# Altium PCB Keypad 2.PcbDoc
Units mm, origin at the board's own origin, x right, y up, seen from the top; angles counter-clockwise.
Board outline 100 x 100 mm, 2 copper layers (Top Layer, Bottom Layer); 34 components, 8 nets, 152 pads, 0 vias.
Unrouted connection lines stored in the file: 16.
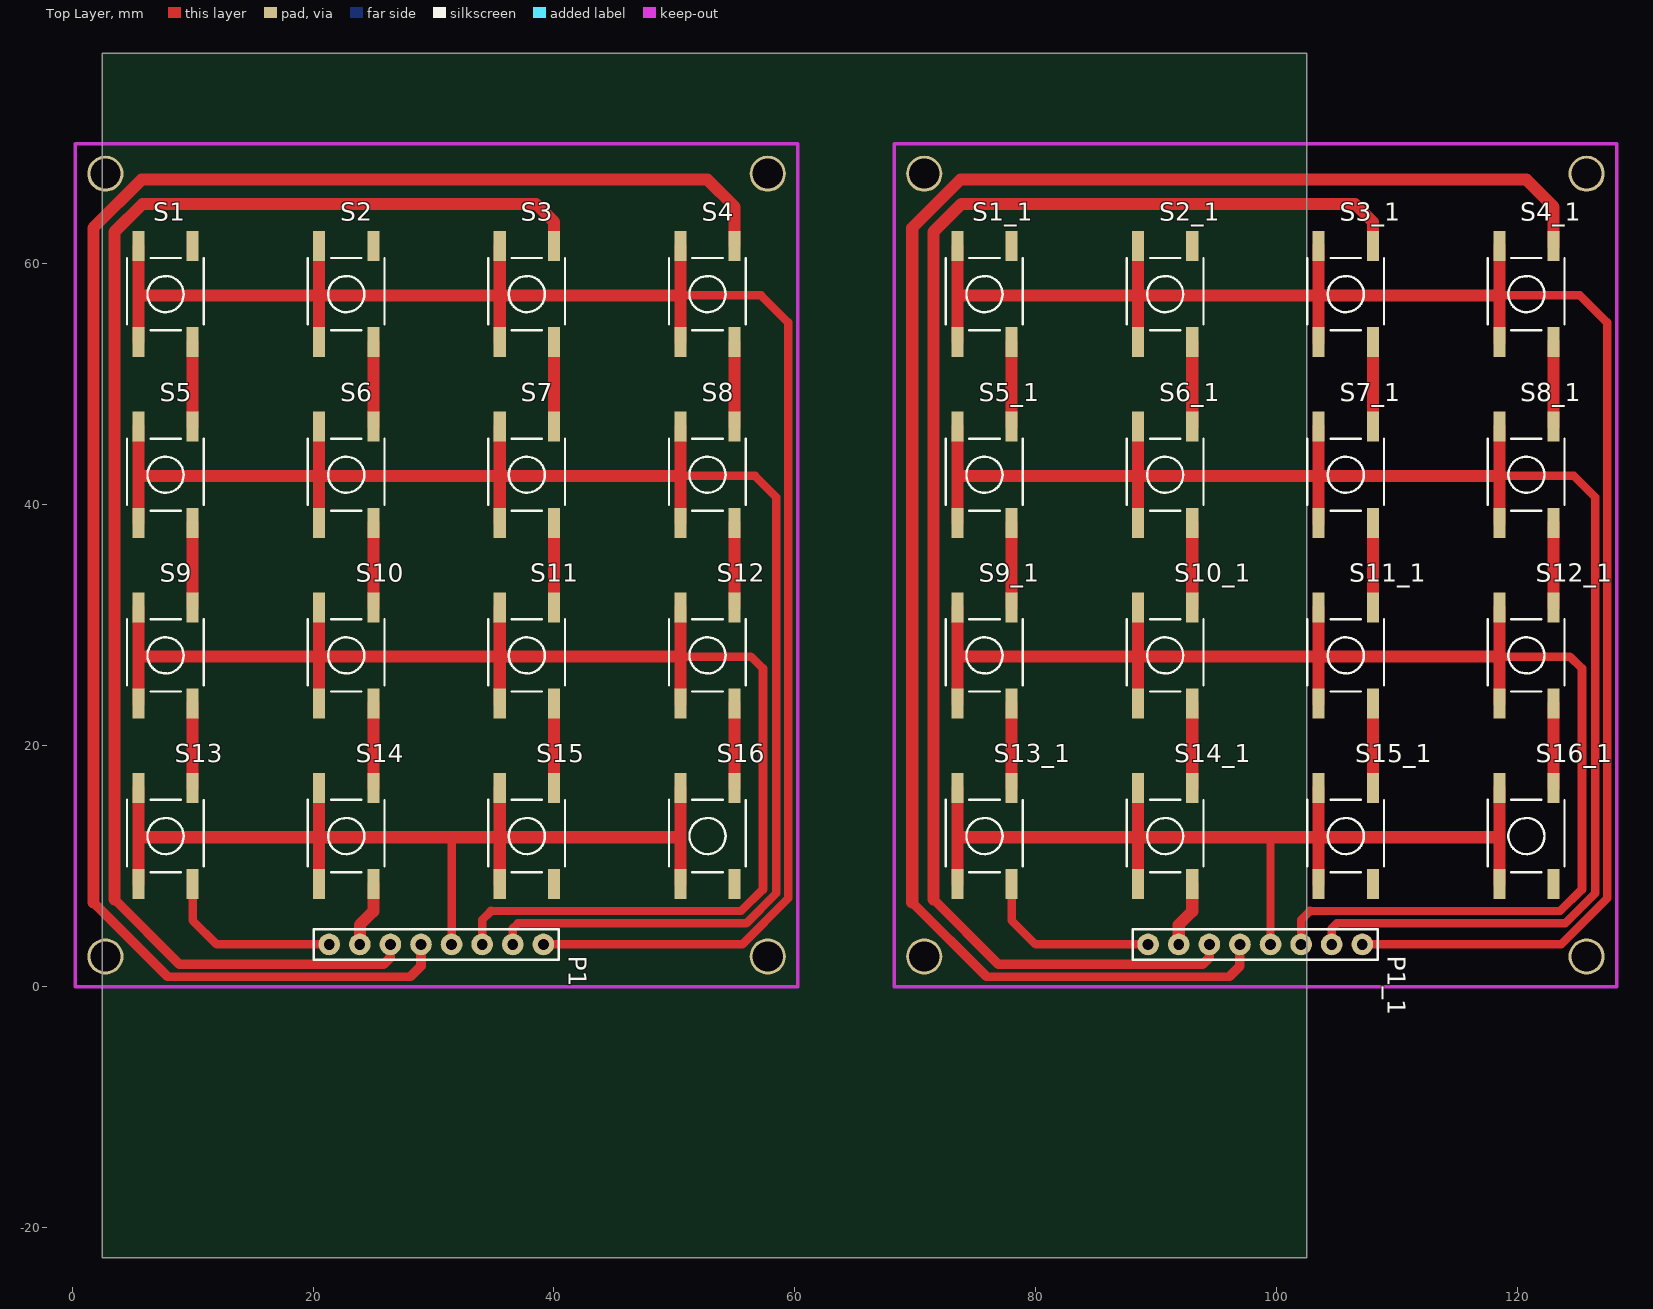
[diagram p0: Top Layer view]
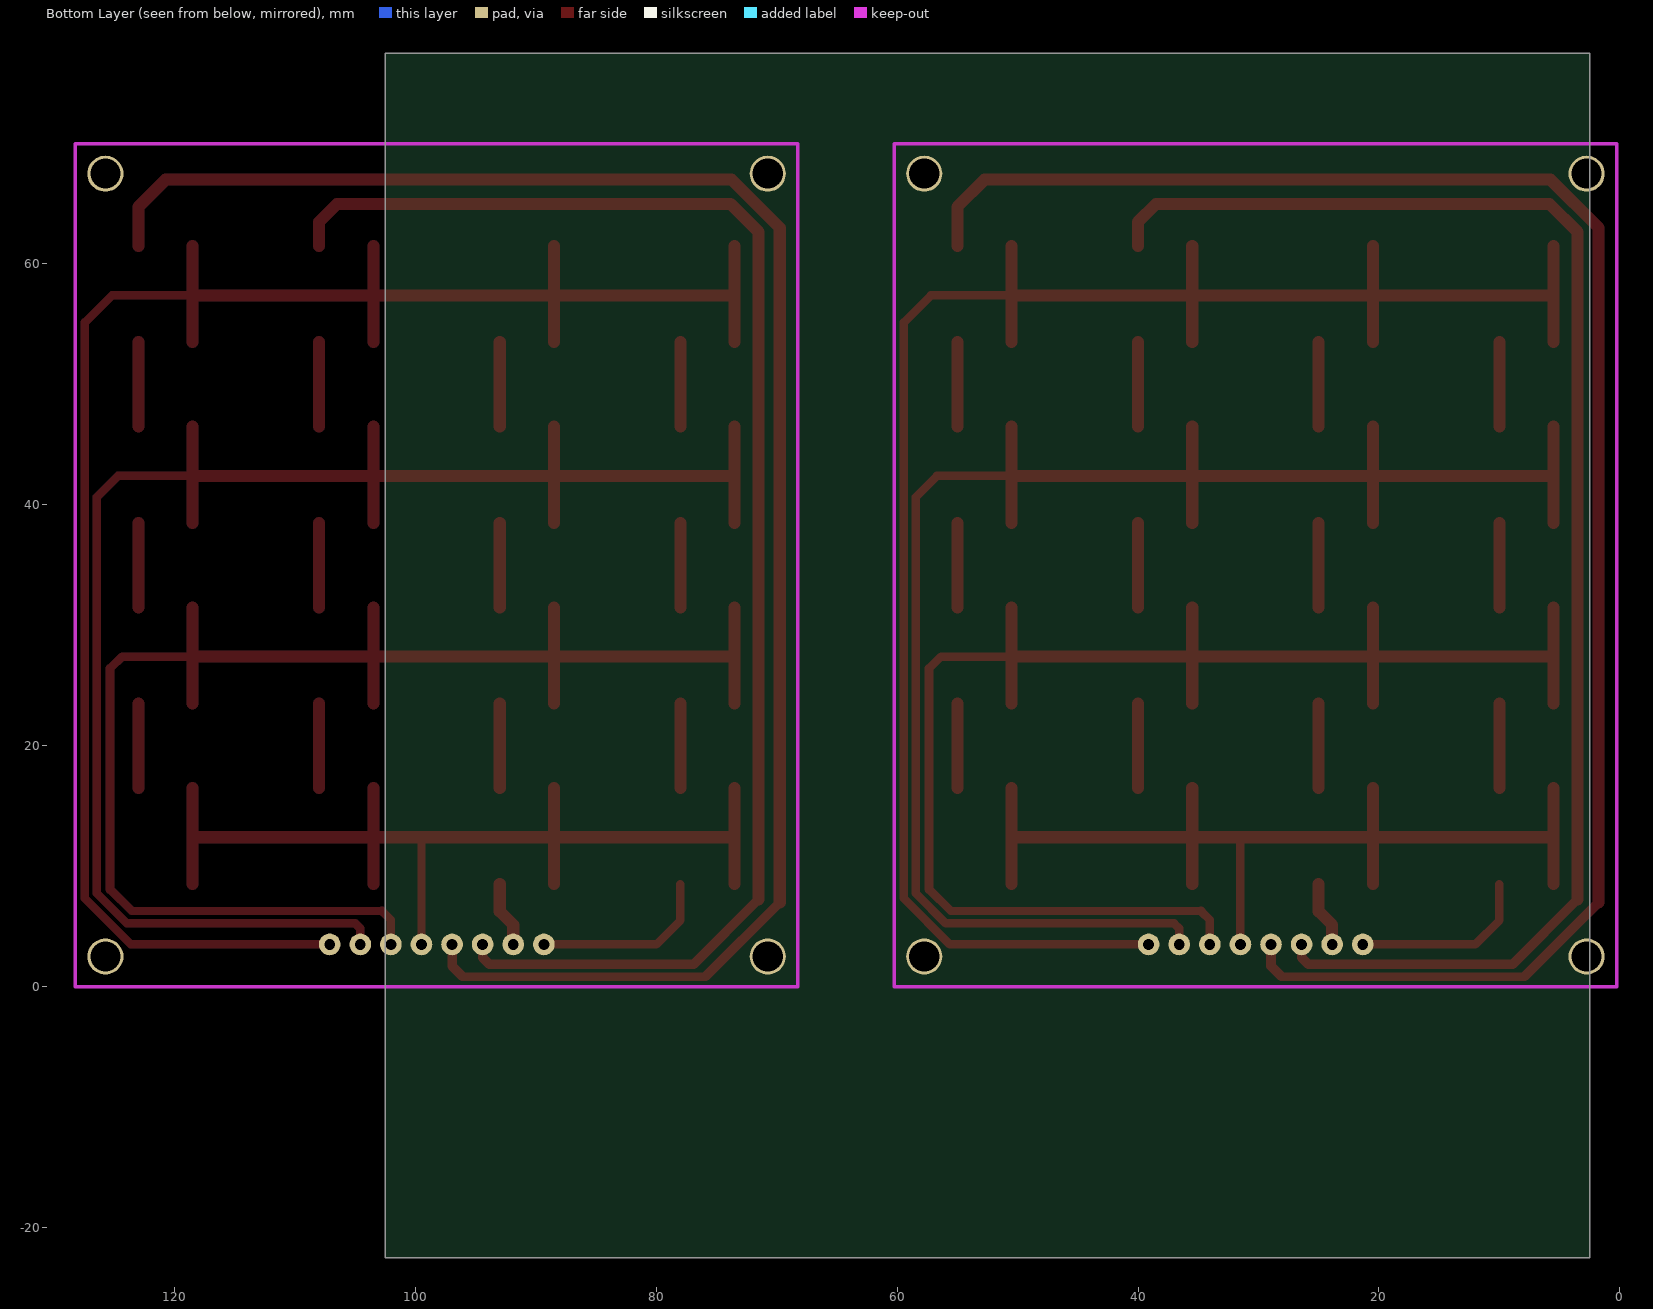
[diagram p1: Bottom Layer view, seen from below]

## Layer stack, top to bottom
Top Solder: solder mask 0.0102, Solder Resist, Dk 3.5
Top Layer: signal copper 0.0356
Dielectric 1: dielectric 0.32, FR-4, Dk 4.8
Bottom Layer: signal copper 0.0356
Bottom Solder: solder mask 0.0102, Solder Resist, Dk 3.5

## Board outline
2.5,-22.5 102.5,-22.5 102.5,77.5 2.5,77.5

## Design rules (kind name [scope] priority, off if disabled: settings)
Clearance [All] p1: gap=0.3
PolygonConnect [All] p1: connectstyle=Relief reliefconductorwidth=0.254 reliefentries=4 polygonreliefangle="90 Angle" airgapwidth=0.254
RoutingVias [All] p1: holewidth=0.6 width=1 viastyle="Through Hole" minholewidth=0.711 minwidth=1.27 maxholewidth=0.711 maxwidth=1.27
SolderMaskExpansion [All] p1: expansion=0.102
Width [All] p1: maxlimit=10 minlimit=0.3 preferedwidth=0.3
30 further rules are at their usual default settings.

## Classes and differential pairs
component class "Keypad 2": P1 S1 S2 S3 S4 S5 S6 S7 S8 S9 S10 S11 S12 S13 S14 S15 S16

## Components (designator, comment, footprint, x,y, rotation, side; value= is the part's Value field where it differs from the comment)
P1 "Header 8" HDR1X8 39.12,3.5 r180 top
P1_1 "Header 8" HDR1X8 107.12,3.5 r180 top (schematic designator P1)
S1 "Switch PB" SW-PB 7.75,57.5 r270 top
S1_1 "Switch PB" SW-PB 75.75,57.5 r270 top (schematic designator S1)
S2 "Switch PB" SW-PB 22.75,57.5 r270 top
S2_1 "Switch PB" SW-PB 90.75,57.5 r270 top (schematic designator S2)
S3 "Switch PB" SW-PB 37.75,57.5 r270 top
S3_1 "Switch PB" SW-PB 105.75,57.5 r270 top (schematic designator S3)
S4 "Switch PB" SW-PB 52.75,57.5 r270 top
S4_1 "Switch PB" SW-PB 120.75,57.5 r270 top (schematic designator S4)
S5 "Switch PB" SW-PB 7.75,42.5 r270 top
S5_1 "Switch PB" SW-PB 75.75,42.5 r270 top (schematic designator S5)
S6 "Switch PB" SW-PB 22.75,42.5 r270 top
S6_1 "Switch PB" SW-PB 90.75,42.5 r270 top (schematic designator S6)
S7 "Switch PB" SW-PB 37.75,42.5 r270 top
S7_1 "Switch PB" SW-PB 105.75,42.5 r270 top (schematic designator S7)
S8 "Switch PB" SW-PB 52.75,42.5 r270 top
S8_1 "Switch PB" SW-PB 120.75,42.5 r270 top (schematic designator S8)
S9 "Switch PB" SW-PB 7.75,27.5 r270 top
S9_1 "Switch PB" SW-PB 75.75,27.5 r270 top (schematic designator S9)
S10 "Switch PB" SW-PB 22.75,27.5 r270 top
S10_1 "Switch PB" SW-PB 90.75,27.5 r270 top (schematic designator S10)
S11 "Switch PB" SW-PB 37.75,27.5 r270 top
S11_1 "Switch PB" SW-PB 105.75,27.5 r270 top (schematic designator S11)
S12 "Switch PB" SW-PB 52.75,27.5 r270 top
S12_1 "Switch PB" SW-PB 120.75,27.5 r270 top (schematic designator S12)
S13 "Switch PB" SW-PB 7.75,12.5 r270 top
S13_1 "Switch PB" SW-PB 75.75,12.5 r270 top (schematic designator S13)
S14 "Switch PB" SW-PB 22.75,12.5 r270 top
S14_1 "Switch PB" SW-PB 90.75,12.5 r270 top (schematic designator S14)
S15 "Switch PB" SW-PB 37.75,12.5 r270 top
S15_1 "Switch PB" SW-PB 105.75,12.5 r270 top (schematic designator S15)
S16 "Switch PB" SW-PB 52.75,12.5 r270 top
S16_1 "Switch PB" SW-PB 120.75,12.5 r270 top (schematic designator S16)

## Footprints (in the part's own frame and the unit in brackets; to place one, negate y for a bottom-side part, rotate by r counter-clockwise, add the part's x,y. Pads: shape width x height; smd on the part's side, far side on the other; paste and mask are expansions set on the pad)
HDR1X8 [mm] "Connector; Header; 8 Position"
  round 1.8 hole 0.9: 1(0,0) 2(2.54,0) 3(5.08,0) 4(7.62,0) 5(10.16,0) 6(12.7,0) 7(15.24,0) 8(17.78,0)
  silkscreen extent -1.27,-1.27 19.05,1.27
SW-PB [mm]
  rect 2.5x1 smd: 1(-3.992,2.25) 1(3.992,2.25) 2(-3.992,-2.25) 2(3.992,-2.25)
  silkscreen extent -3,-3.2 3,3.18, body extent -4.5,-3 4.5,3, height 5

## Part data
P1 P1_1: "Header, 8-Pin"
S1 S1_1 S2 S2_1 S3 S3_1 S4 S4_1 S5 S5_1 S6 S6_1 S7 S7_1 S8 S8_1 S9 S9_1 S10 S10_1 S11 S11_1 S12 S12_1 S13 S13_1 S14 S14_1 S15 S15_1 S16 S16_1: "Push Button Switch"

## Free pads (board coordinates)
  round 3 hole 2.5: 0(2.75,2.5) 0(2.75,67.5) 0(57.75,2.5) 0(57.75,67.5) 0(70.75,2.5) 0(70.75,67.5) 0(125.75,2.5) 0(125.75,67.5)

## Nets (pads, with @x,y where several pads share a name; then routed paths per layer and width w, separated by ;. In a path a pad name is that pad's centre, name@x,y a point inside that pad or via, vN(x,y) a via of type N, cw(c..) or ccw(c..) an arc to the next point about the centre after c; other vN are vias at no path point)
C1: P1.5 S4.1 S8.1 S12.1 S16.1 | length 168.1
  Top Layer w0.7: 1.75,62.75 1.75,63 ; 5.75,67 6,67 ; 7.9,0.85 7.95,0.8 28.05,0.8 28.1,0.85
  Top Layer w0.8: 1.75,7 7.9,0.85 ; 28.1,0.85 28.96,1.71 P1.5
  Top Layer w1: 1.75,7 1.75,62.75 ; 1.75,63 5.75,67 ; 6,67 52.75,67 55,64.75 S4.1@55,61.492 ; S16.1@55,16.492 S12.1@55,23.507 ; S12.1@55,31.492 S8.1@55,38.507 ; S8.1@55,46.492 S4.1@55,53.508
C2: P1.6 S3.1 S7.1 S11.1 S15.1 | length 143
  Top Layer w0.8: 3.5,7.25 8.9,1.85 25.85,1.85 26.42,2.42 P1.6
  Top Layer w1: 3.5,7.25 3.5,62.657 5.843,65 38.5,65 40,63.5 S3.1@40,61.492 ; S15.1@40,16.492 S11.1@40,23.507 ; S11.1@40,31.492 S7.1@40,38.507 ; S7.1@40,46.492 S3.1@40,53.508
C3: P1.7 S2.1 S6.1 S10.1 S14.1 | length 26.5
  Top Layer w1: P1.7 23.88,5.13 25,6.25 S14.1@25,8.508 ; S14.1@25,16.492 S10.1@25,23.507 ; S10.1@25,31.492 S6.1@25,38.507 ; S6.1@25,46.492 S2.1@25,53.508
C4: P1.8 S1.1 S5.1 S9.1 S13.1 | length 36.2
  Top Layer w0.7: S13.1@10,8.508 10,5.5 12,3.5 P1.8
  Top Layer w1: S13.1@10,16.492 S9.1@10,23.507 ; S9.1@10,31.492 S5.1@10,38.507 ; S5.1@10,46.492 S1.1@10,53.508
R1: P1.1 S1.2 S2.2 S3.2 S4.2 | length 156.6
  Top Layer w0.7: P1.1 54,3.5 55.632,3.5 59.45,7.318 59.45,55.15 57.2,57.4 50.5,57.4
  Top Layer w1: S1.2@5.5,53.508 5.5,57.4 ; S1.2@5.5,61.492 5.5,57.4 ; S2.2@20.5,53.508 20.5,57.4 ; S2.2@20.5,61.492 20.5,57.4 ; S3.2@35.5,53.508 35.5,57.4 ; S3.2@35.5,61.492 35.5,57.4 ; S4.2@50.5,53.508 50.5,57.4 ; S4.2@50.5,61.492 50.5,57.4 ; 5.5,57.4 20.5,57.4 ; 20.5,57.4 35.5,57.4 ; 35.5,57.4 50.5,57.4
R2: P1.2 S5.2 S6.2 S7.2 S8.2 | length 142.9
  Top Layer w0.7: P1.2 36.58,4.83 37,5.25 55.967,5.25 58.45,7.733 58.45,40.65 56.7,42.4 50.5,42.4
  Top Layer w1: S5.2@5.5,38.507 5.5,42.4 ; S5.2@5.5,46.492 5.5,42.4 ; S6.2@20.5,38.507 20.5,42.4 ; S6.2@20.5,46.492 20.5,42.4 ; S7.2@35.5,38.507 35.5,42.4 ; S7.2@35.5,46.492 35.5,42.4 ; S8.2@50.5,38.507 50.5,42.4 ; S8.2@50.5,46.492 50.5,42.4 ; 5.5,42.4 20.5,42.4 ; 20.5,42.4 35.5,42.4 ; 35.5,42.4 50.5,42.4
R3: P1.3 S9.2 S10.2 S11.2 S12.2 | length 128.9
  Top Layer w0.7: P1.3 34.04,5.54 34.75,6.25 ; 34.775,6.275 55.543,6.275 57.35,8.082 ; 50.5,27.4 56.35,27.4 57.35,26.4
  Top Layer w0.75: 34.75,6.25 34.775,6.275 ; 57.35,8.082 57.35,26.4
  Top Layer w1: S9.2@5.5,23.507 5.5,27.4 ; S9.2@5.5,31.492 5.5,27.4 ; S10.2@20.5,23.507 20.5,27.4 ; S10.2@20.5,31.492 20.5,27.4 ; S11.2@35.5,23.507 35.5,27.4 ; S11.2@35.5,31.492 35.5,27.4 ; S12.2@50.5,23.507 50.5,27.4 ; S12.2@50.5,31.492 50.5,27.4 ; 5.5,27.4 20.5,27.4 ; 20.5,27.4 35.5,27.4 ; 35.5,27.4 50.5,27.4
R4: P1.4 S13.2 S14.2 S15.2 S16.2 | length 85.8
  Top Layer w0.7: P1.4 31.5,12.4
  Top Layer w1: S13.2@5.5,8.508 5.5,12.4 ; S13.2@5.5,16.492 5.5,12.4 ; S14.2@20.5,8.508 20.5,12.4 ; S14.2@20.5,16.492 20.5,12.4 ; S15.2@35.5,8.508 35.5,12.4 ; S15.2@35.5,16.492 35.5,12.4 ; S16.2@50.5,8.508 50.5,12.4 ; S16.2@50.5,16.492 50.5,12.4 ; 5.5,12.4 20.5,12.4 ; 20.5,12.4 31.5,12.4 35.5,12.4 ; 35.5,12.4 50.5,12.4
pads on no net: P1_1.1 P1_1.2 P1_1.3 P1_1.4 P1_1.5 P1_1.6 P1_1.7 P1_1.8 S1_1.1 S1_1.2 S2_1.1 S2_1.2 S3_1.1 S3_1.2 S4_1.1 S4_1.2 S5_1.1 S5_1.2 S6_1.1 S6_1.2 S7_1.1 S7_1.2 S8_1.1 S8_1.2 S9_1.1 S9_1.2 S10_1.1 S10_1.2 S11_1.1 S11_1.2 S12_1.1 S12_1.2 S13_1.1 S13_1.2 S14_1.1 S14_1.2 S15_1.1 S15_1.2 S16_1.1 S16_1.2
copper on no net: | length 888.1
  Top Layer w0.7: 69.75,62.75 69.75,63 ; 73.75,67 74,67 ; 75.9,0.85 75.95,0.8 96.05,0.8 96.1,0.85 ; 78,8.508 78,5.5 80,3.5 89.34,3.5 ; 99.5,3.5 99.5,12.4 ; 102.04,3.5 102.04,5.54 102.75,6.25 ; 102.775,6.275 123.543,6.275 125.35,8.082 ; 104.58,3.5 104.58,4.83 105,5.25 123.967,5.25 126.45,7.733 126.45,40.65 124.7,42.4 118.5,42.4 ; 107.12,3.5 122,3.5 123.632,3.5 127.45,7.318 127.45,55.15 125.2,57.4 118.5,57.4 ; 118.5,27.4 124.35,27.4 125.35,26.4
  Top Layer w0.75: 102.75,6.25 102.775,6.275 ; 125.35,8.082 125.35,26.4
  Top Layer w0.8: 69.75,7 75.9,0.85 ; 71.5,7.25 76.9,1.85 93.85,1.85 94.42,2.42 94.42,3.5 ; 96.1,0.85 96.96,1.71 96.96,3.5
  Top Layer w1: 69.75,7 69.75,62.75 ; 69.75,63 73.75,67 ; 71.5,7.25 71.5,62.657 73.843,65 106.5,65 108,63.5 108,61.492 ; 73.5,8.508 73.5,12.4 ; 73.5,16.492 73.5,12.4 ; 73.5,23.507 73.5,27.4 ; 73.5,31.492 73.5,27.4 ; 73.5,38.507 73.5,42.4 ; 73.5,46.492 73.5,42.4 ; 73.5,53.508 73.5,57.4 ; 73.5,61.492 73.5,57.4 ; 74,67 120.75,67 123,64.75 123,61.492 ; 78,16.492 78,23.507 ; 78,31.492 78,38.507 ; 78,46.492 78,53.508 ; 88.5,8.508 88.5,12.4 ; 88.5,16.492 88.5,12.4 ; 88.5,23.507 88.5,27.4 ; 88.5,31.492 88.5,27.4 ; 88.5,38.507 88.5,42.4 ; 88.5,46.492 88.5,42.4 ; 88.5,53.508 88.5,57.4 ; 88.5,61.492 88.5,57.4 ; 91.88,3.5 91.88,5.13 93,6.25 93,8.508 ; 93,16.492 93,23.507 ; 93,31.492 93,38.507 ; 93,46.492 93,53.508 ; 103.5,8.508 103.5,12.4 ; 103.5,16.492 103.5,12.4 ; 103.5,23.507 103.5,27.4 ; 103.5,31.492 103.5,27.4 ; 103.5,38.507 103.5,42.4 ; 103.5,46.492 103.5,42.4 ; 103.5,53.508 103.5,57.4 ; 103.5,61.492 103.5,57.4 ; 108,16.492 108,23.507 ; 108,31.492 108,38.507 ; 108,46.492 108,53.508 ; 118.5,8.508 118.5,12.4 ; 118.5,16.492 118.5,12.4 ; 118.5,23.507 118.5,27.4 ; 118.5,31.492 118.5,27.4 ; 118.5,38.507 118.5,42.4 ; 118.5,46.492 118.5,42.4 ; 118.5,53.508 118.5,57.4 ; 118.5,61.492 118.5,57.4 ; 123,16.492 123,23.507 ; 123,31.492 123,38.507 ; 123,46.492 123,53.508 ; 73.5,12.4 88.5,12.4 ; 73.5,27.4 88.5,27.4 ; 73.5,42.4 88.5,42.4 ; 73.5,57.4 88.5,57.4 ; 88.5,12.4 99.5,12.4 103.5,12.4 ; 88.5,27.4 103.5,27.4 ; 88.5,42.4 103.5,42.4 ; 88.5,57.4 103.5,57.4 ; 103.5,12.4 118.5,12.4 ; 103.5,27.4 118.5,27.4 ; 103.5,42.4 118.5,42.4 ; 103.5,57.4 118.5,57.4

## Keep-outs
Keep-Out Layer:
  lines w0.3: 0.25,0 0.25,70 60.25,70 60.25,0 0.25,0 ; 68.25,0 128.25,0 128.25,70 68.25,70 68.25,0

## Dimensions
68.25,0 to 128.25,0 on Mechanical 1
68.25,0 to 68.25,70 on Mechanical 1
0.25,0 to 0.25,70 on Mechanical 1
0.25,0 to 60.25,0 on Mechanical 1